# Altium PCB H01R0.PcbDoc (part 2 of 2)
Units mm, origin at the board's own origin, x right, y up, seen from the top; angles counter-clockwise.
Board outline 60 x 60.6 mm, 2 copper layers (Top Layer, Bottom Layer); 28 components, 19 nets, 103 pads, 0 vias.
Unrouted connection lines stored in the file: 42.
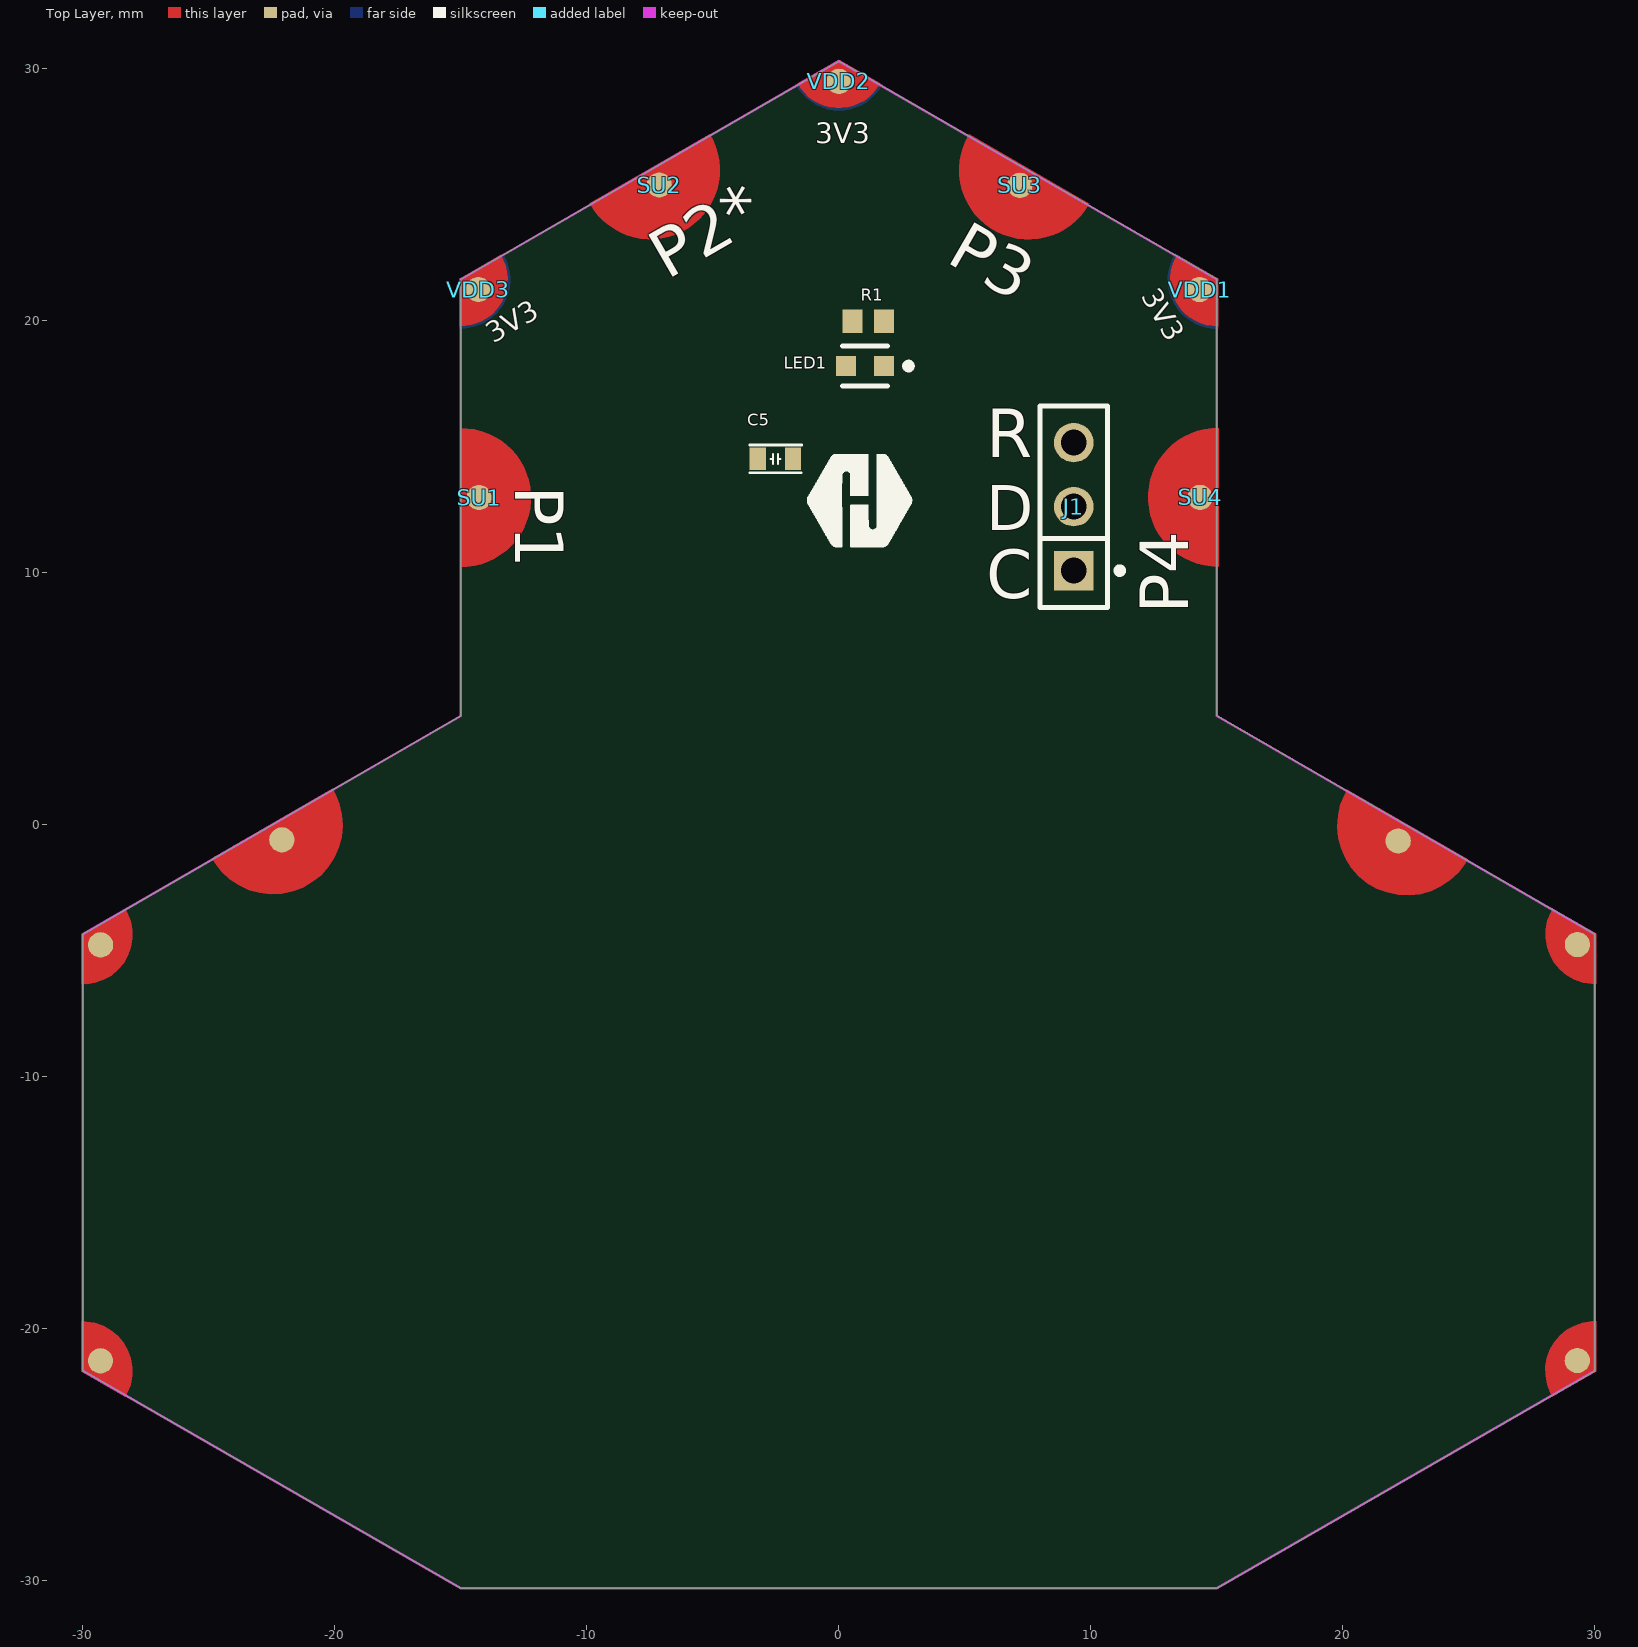
[diagram p0: Top Layer view]

## Other copper (continued)
Bottom Layer: (continued)
  region: -30.042,-6.315 -29.866,-6.32 -29.52,-6.266 -29.189,-6.152 -28.883,-5.981 -28.612,-5.758 -28.386,-5.49 -28.211,-5.187 -28.092,-4.857 -28.034,-4.511 -28.039,-4.16 -28.105,-3.816 -28.232,-3.49 -28.324,-3.34 -30.039,-4.333

## Silkscreen, mask and mechanical layers (free items; w line width, h text height)
Top Overlay:
  drawing of 1337 lines, arcs and shapes, not listed
  text "3V3" at -0.94,27.051 h0.81
  text "P3" at 4.208,22.366 h1.93 r330
  text "P2*" at -6.816,21.604 h1.93 r30
  text "3V3" at 11.978,20.988 h0.81 r300
  text "3V3" at -13.714,19.08 h0.81 r30
  text "R" at 5.842,14.58 h1.93
  text "P1" at -12.852,13.462 h1.93 r270
  text "D" at 5.842,11.684 h1.78
  text "C" at 5.842,8.992 h1.93
  text "P4" at 13.868,8.382 h1.93 r90
Bottom Overlay:
  text "GND" at 1.402,27.328 h0.81
  text "P2*" at -4.208,22.874 h1.93 r30
  text "GND" at 12.638,21.369 h0.81 r120
  text "P3" at 6.816,21.096 h1.93 r330
  text "GND" at -11.814,20.02 h0.81 r30
  text "P1" at -12.852,11.43 h1.93 r270
  text "P4" at 13.868,10.922 h1.93 r90
  text "H01R00" at -0.762,3.302 h1.78
Top Solder:
  region: 24.076,-0.865 23.992,-1.02 23.768,-1.289 23.495,-1.509 23.183,-1.67 22.846,-1.766 22.496,-1.793 22.148,-1.749 21.815,-1.638 21.512,-1.463 21.249,-1.231 21.037,-0.951 20.885,-0.635 20.799,-0.295 20.782,0.055 20.835,0.401 20.956,0.731 21.048,0.88
  region: 30.048,-6.307 29.873,-6.311 29.527,-6.258 29.195,-6.143 28.889,-5.972 28.619,-5.749 28.392,-5.482 28.217,-5.178 28.099,-4.848 28.041,-4.502 28.045,-4.152 28.112,-3.808 28.239,-3.481 28.33,-3.331 30.046,-4.324
  region: 30.044,-19.705 29.869,-19.701 29.523,-19.754 29.191,-19.869 28.885,-20.04 28.615,-20.263 28.388,-20.531 28.213,-20.834 28.095,-21.164 28.037,-21.51 28.041,-21.86 28.108,-22.204 28.235,-22.531 28.326,-22.681 30.042,-21.688
  region: -20.967,0.924 -20.875,0.775 -20.754,0.446 -20.701,0.099 -20.717,-0.251 -20.803,-0.591 -20.954,-0.907 -21.166,-1.187 -21.428,-1.419 -21.732,-1.595 -22.064,-1.706 -22.412,-1.75 -22.762,-1.723 -23.099,-1.628 -23.411,-1.468 -23.685,-1.248 -23.909,-0.979 -23.993,-0.825
  region: -30.046,-19.714 -29.87,-19.71 -29.524,-19.763 -29.193,-19.877 -28.887,-20.049 -28.616,-20.272 -28.39,-20.539 -28.214,-20.843 -28.096,-21.173 -28.038,-21.519 -28.043,-21.869 -28.109,-22.213 -28.236,-22.54 -28.328,-22.69 -30.043,-21.696
  region: -30.042,-6.315 -29.866,-6.32 -29.52,-6.266 -29.189,-6.152 -28.883,-5.981 -28.612,-5.758 -28.386,-5.49 -28.211,-5.187 -28.092,-4.857 -28.034,-4.511 -28.039,-4.16 -28.105,-3.816 -28.232,-3.49 -28.324,-3.34 -30.039,-4.333
Bottom Solder:
  region: 24.076,-0.865 23.992,-1.02 23.768,-1.289 23.495,-1.509 23.183,-1.67 22.846,-1.766 22.496,-1.793 22.148,-1.749 21.815,-1.638 21.512,-1.463 21.249,-1.231 21.037,-0.951 20.885,-0.635 20.799,-0.295 20.782,0.055 20.835,0.401 20.956,0.731 21.048,0.88
  region: 30.048,-6.307 29.873,-6.311 29.527,-6.258 29.195,-6.143 28.889,-5.972 28.619,-5.749 28.392,-5.482 28.217,-5.178 28.099,-4.848 28.041,-4.502 28.045,-4.152 28.112,-3.808 28.239,-3.481 28.33,-3.331 30.046,-4.324
  region: 30.044,-19.705 29.869,-19.701 29.523,-19.754 29.191,-19.869 28.885,-20.04 28.615,-20.263 28.388,-20.531 28.213,-20.834 28.095,-21.164 28.037,-21.51 28.041,-21.86 28.108,-22.204 28.235,-22.531 28.326,-22.681 30.042,-21.688
  region: -20.967,0.924 -20.875,0.775 -20.754,0.446 -20.701,0.099 -20.717,-0.251 -20.803,-0.591 -20.954,-0.907 -21.166,-1.187 -21.428,-1.419 -21.732,-1.595 -22.064,-1.706 -22.412,-1.75 -22.762,-1.723 -23.099,-1.628 -23.411,-1.468 -23.685,-1.248 -23.909,-0.979 -23.993,-0.825
  region: -30.046,-19.714 -29.87,-19.71 -29.524,-19.763 -29.193,-19.877 -28.887,-20.049 -28.616,-20.272 -28.39,-20.539 -28.214,-20.843 -28.096,-21.173 -28.038,-21.519 -28.043,-21.869 -28.109,-22.213 -28.236,-22.54 -28.328,-22.69 -30.043,-21.696
  region: -30.042,-6.315 -29.866,-6.32 -29.52,-6.266 -29.189,-6.152 -28.883,-5.981 -28.612,-5.758 -28.386,-5.49 -28.211,-5.187 -28.092,-4.857 -28.034,-4.511 -28.039,-4.16 -28.105,-3.816 -28.232,-3.49 -28.324,-3.34 -30.039,-4.333

## Text inside footprints (layer, text, board x,y; h text height)
C2: Mechanical 32 "1" at -4.895,8.427 h0.64; Mechanical 32 "2" at -6.749,8.427 h0.64; Mechanical 33 "C40" at -7.943,8.244 h0.64
C4: Mechanical 32 "1" at -7.257,6.268 h0.64 r180; Mechanical 32 "2" at -5.403,6.268 h0.64 r180; Mechanical 33 "C40" at -4.209,6.45 h0.64 r180